# Altium PCB Exp 11a.PcbDoc
Units mm, origin at the board's own origin, x right, y up, seen from the top; angles counter-clockwise.
Board outline 134.49 x 84.46 mm, 2 copper layers (Top Layer, Bottom Layer); 44 components, 34 nets, 146 pads, 16 vias.
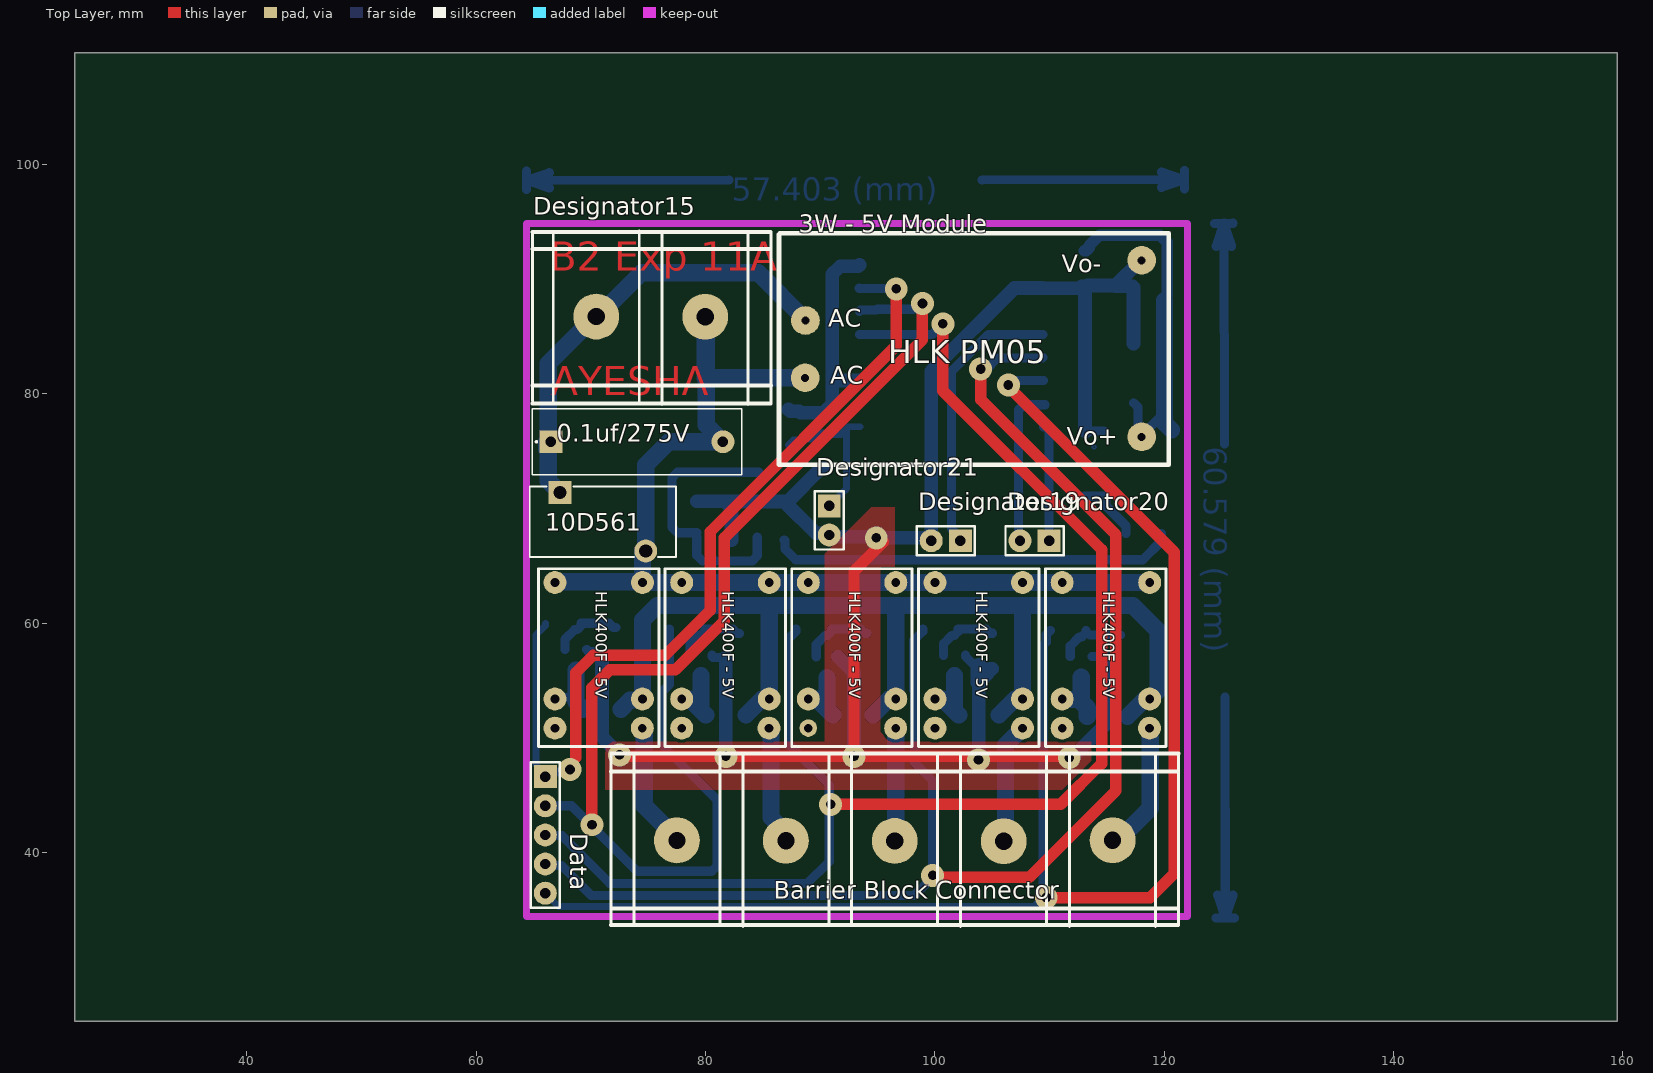
[diagram p0: Top Layer view]
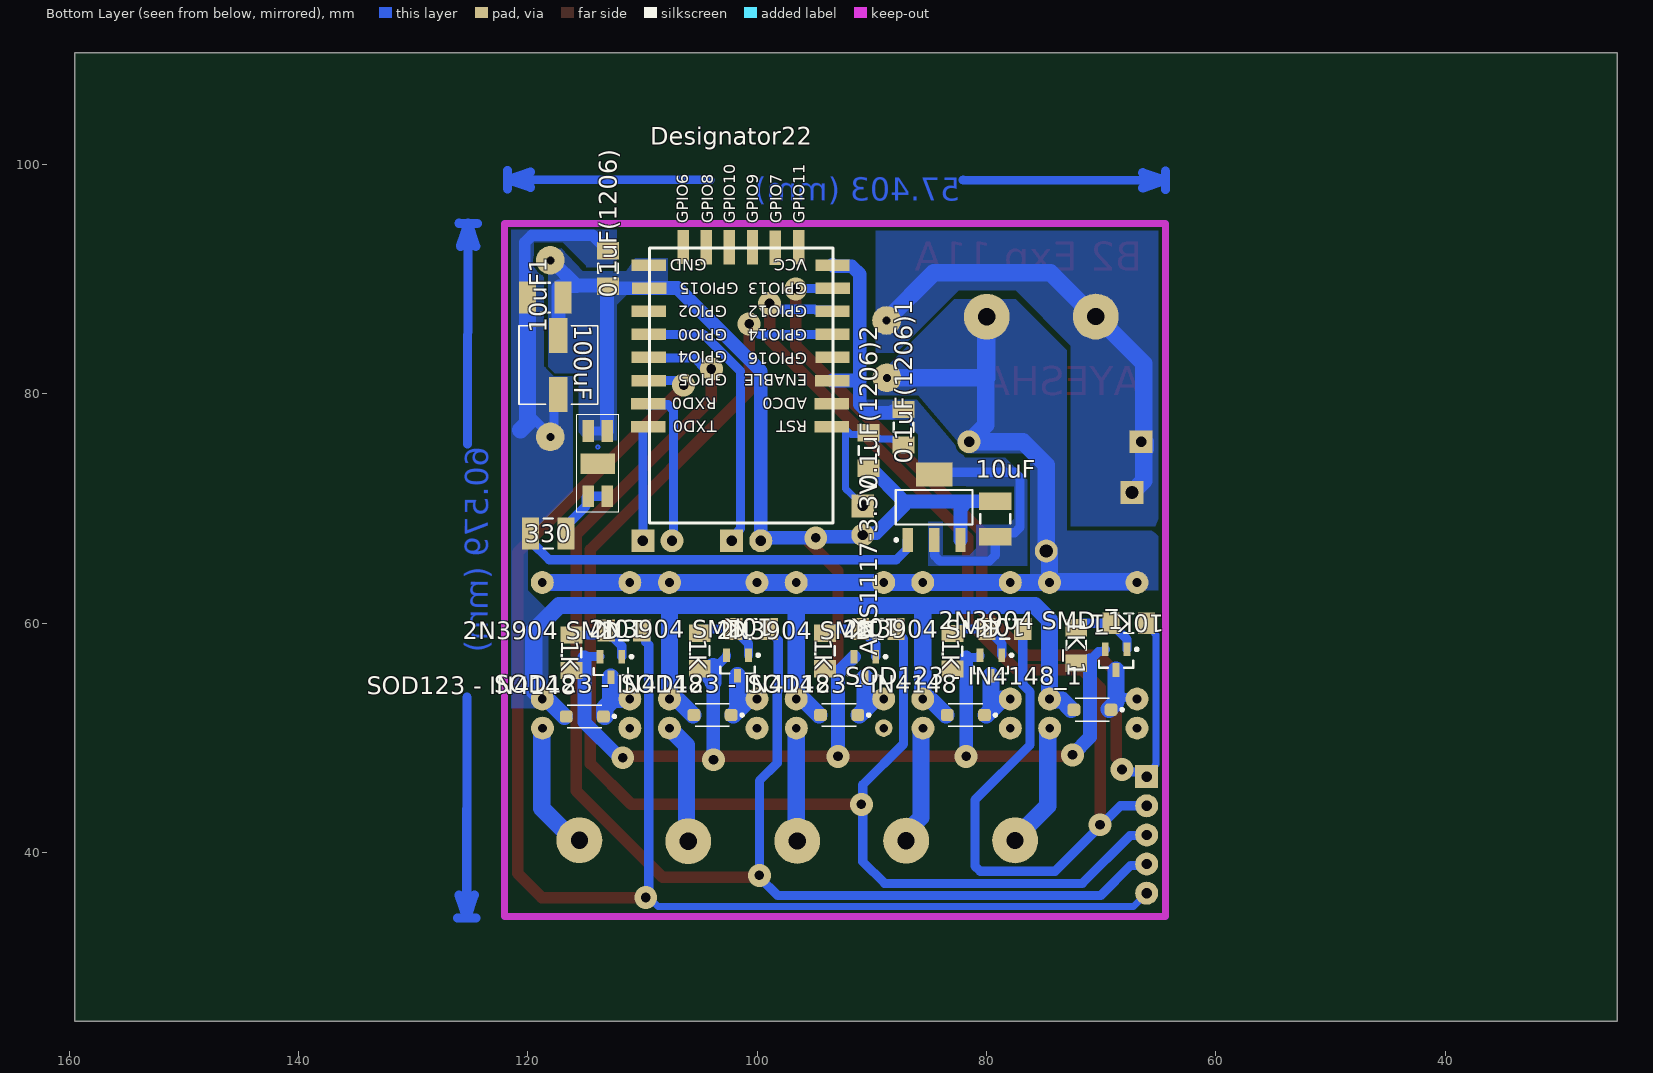
[diagram p1: Bottom Layer view, seen from below]

## Layer stack, top to bottom
Top Solder: solder mask 0.0102, Solder Resist, Dk 3.5
Top Layer: signal copper 0.0356
Dielectric 1: dielectric 0.32, FR-4, Dk 4.8
Bottom Layer: signal copper 0.0356
Bottom Solder: solder mask 0.0102, Solder Resist, Dk 3.5

## Board outline
25.019,25.273 159.512,25.273 159.512,109.728 25.019,109.728

## Design rules (kind name [scope] priority, off if disabled: settings)
Clearance [All] p1: gap=0.254 ignorepadtopadclearanceinfootprint=FALSE except(0: Arc-Hole Track-Hole SMDPad-Hole THPad-Hole Via-Hole Fill-Hole Poly-Hole Region-Hole Text-Hole)
PlaneConnect [All] p1: planeconnectstyle=Direct reliefexpansion=0.508 reliefentries=4 reliefconductorwidth=0.254 reliefairgap=0.254
PolygonConnect PolygonConnect_2 [All] p1: connectstyle=Direct reliefconductorwidth=0.254 reliefentries=4 polygonreliefangle="90 Angle" airgapwidth=0.254
PolygonConnect PolygonConnect_1 [All] p2: connectstyle=Direct reliefconductorwidth=0.254 reliefentries=4 polygonreliefangle="90 Angle" airgapwidth=0.254
PolygonConnect [All] p3: connectstyle=Direct reliefconductorwidth=0.254 reliefentries=4 polygonreliefangle="90 Angle" airgapwidth=0.254
RoutingVias [All] p1: holewidth=0.711 width=1.27 viastyle="Through Hole" minholewidth=0.711 minwidth=1.27 maxholewidth=0.711 maxwidth=1.27
SolderMaskExpansion [All] p1: expansion=0.102 istentingtop=FALSE
Width [All] p1: maxlimit=1.5 minlimit=0.2 preferedwidth=1 toplayer_minwidth=0.6 bottomlayer_prefwidth=0.6 minimp=50.000000 maximp=50.000000 favimp=50.000000
29 further rules are at their usual default settings.

## Components (designator, comment, footprint, x,y, rotation, side; value= is the part's Value field where it differs from the comment)
0.1uF(1206) "Comment" CAPC3216M 113.03,90.932 r90 bottom
0.1uF(1206)1 "Comment" CAPC3216M 87.249,77.089 r90 bottom
0.1uF(1206)2 "Comment" CAPC3216M 90.297,75.057 r90 bottom
0.1uf/275V "Comment" CAP_ECQ-UAAF104MA_PAN 66.534,75.819 r0 top
1K "Comment" RESC3216M 82.979,57.548 r270 bottom
1K "Comment" RESC3216M 94.107,57.575 r270 bottom
1K "Comment" RESC3216M 105.029,57.575 r270 bottom
1K "Comment" RESC3216M 116.205,57.422 r270 bottom
1K_1 "Comment" RESC3216M 72.184,58.056 r270 bottom
"2N3904 SMD" "Comment" SOT23-3L 79.629,56.305 r270 bottom
"2N3904 SMD" "Comment" SOT23-3L 90.617,56.167 r270 bottom
"2N3904 SMD" "Comment" SOT23-3L 101.727,56.305 r270 bottom
"2N3904 SMD" "Comment" SOT23-3L 112.776,56.178 r270 bottom
"2N3904 SMD_1" "Comment" SOT23-3L 68.707,56.813 r270 bottom
"3W - 5V Module" "Comment" HLK-PM05 103.378,83.947 r0 top
10D561 "Comment" MOV-10D561K_BRN 67.31,71.399 r0 top
10K "Comment" RESC3216M 78.407,59.479 r0 bottom
10K "Comment" RESC3216M 89.456,59.479 r0 bottom
10K "Comment" RESC3216M 100.505,59.479 r0 bottom
10K "Comment" RESC3216M 111.633,59.353 r0 bottom
10K_1 "Comment" RESC3216M 67.612,59.987 r0 bottom
10uF "Comment" CAPC3225M 79.248,69.088 r90 bottom
10uF1 "Comment" CAPC3225M 118.491,88.392 r180 bottom
100uF "Comment" CHEMI-F80 117.348,82.512 r270 bottom
330 "Comment" RESC3225M 118.237,67.818 r180 bottom
AMS1117-3.3V "Comment" SOT223-4L 84.582,70.104 r90 bottom
"Barrier Block Connector" "Comment" "Barrier Block Connector"#1 96.52,41.021 r90 top
Data "Comment" HDR1X5 66.04,46.609 r270 top
Designator15 "Comment" "Barrier Block Connector"#2 60.985,86.747 r270 top
Designator19 "Comment" HDR1X2 102.235,67.183 r180 top
Designator20 "Comment" HDR1X2 109.982,67.183 r180 top
Designator21 "Comment" HDR1X2 90.805,70.231 r270 top
Designator22 "Comment" esp8266-12F 101.473,84.963 r90 bottom
"SOD123 - IN4148" "Comment" SODFL3718X108N 81.836,51.986 r0 bottom
"SOD123 - IN4148" "Comment" SODFL3718X108N 92.885,51.986 r0 bottom
"SOD123 - IN4148" "Comment" SODFL3718X108N 103.934,51.986 r0 bottom
"SOD123 - IN4148" "Comment" SODFL3718X108N 115.062,51.86 r0 bottom
"SOD123 - IN4148_1" "Comment" SODFL3718X108N 70.79,52.451 r0 bottom
? "Comment" HLK400F-5V#1 114.935,57.194 r270 top
? "Comment" HLK400F-5V#2 92.794,57.194 r270 top
? "Comment" HLK400F-5V#1 103.85,57.194 r270 top
? "Comment" HLK400F-5V#1 81.752,57.194 r270 top
? "Comment" SMD-LED 113.919,73.914 r90 bottom
? "Comment" HLK400F-5V#1 70.696,57.194 r270 top

## Footprints (in the part's own frame and the unit in brackets; to place one, negate y for a bottom-side part, rotate by r counter-clockwise, add the part's x,y. Pads: shape width x height; smd on the part's side, far side on the other; paste and mask are expansions set on the pad)
"Barrier Block Connector"#1 [mm] "5 pin Barrier Block Connector"
  round 4 hole 1.5: 1(0.031,19) 2(0.006,9.5) 3(-0.019,0) 4(-0.044,-9.5) 5(0.044,-19)
  silkscreen extent -7.47,-24.75 7.68,24.75
"Barrier Block Connector"#2 [mm] "8 pin Barrier Block Connector"
  round 4 hole 1.5: 1(0.031,19) 2(0.006,9.5)
  silkscreen extent -7.47,3.94 7.68,24.75
CAP_ECQ-UAAF104MA_PAN [mm]
  rect 2x2 hole 0.914 mask+0: 1(0,0)
  round 2 hole 0.914 mask+0: 2(15,0)
  silkscreen extent -1.63,-2.88 16.63,2.88, body extent -1.5,-2.76 16.5,2.76, height 12.5
CAPC3216M [mm] "Chip Capacitor, Body 3.2x1.6mm, IPC Low Density"
  rect 1.5x1.9 smd: 1(-1.55,0) 2(1.55,0)
  silkscreen extent -0.4,-0.85 0.4,0.85, body extent -1.7,-0.9 1.7,0.9, height 1.35
CAPC3225M [mm] "Chip Capacitor, Body 3.2x2.5mm, IPC Low Density"
  rect 1.5x2.8 smd: 1(-1.55,0) 2(1.55,0)
  silkscreen extent -0.4,-1.3 0.4,1.3, body extent -1.7,-1.35 1.7,1.35, height 1.35
CHEMI-F80 [mil]
  rect 120x63 smd paste+0 mask+0: 1(-101.5,0) 2(101.5,0)
  silkscreen extent -135,-135 135,135, body extent -141,-130 141,130, height 305
esp8266-12F [mm]
  rect 1x3 smd: 0(-7.837,-7.979) 0(-7.836,8.029) 0(-5.812,-7.954) 0(-5.811,8.054) 0(-3.812,-8.004) 0(-3.811,8.004) 0(-1.787,-8.029) 0(-1.786,7.979) 0(0.212,-8.029) 0(0.213,7.979) 0(2.237,-8.029) 0(2.238,7.979) 0(4.237,-8.054) 0(4.238,7.954) 0(6.262,-8.029) 0(6.263,7.979)
  rect 3x1 smd: 0(7.787,-3.054) 0(7.812,-5.079) 0(7.812,-1.054) 0(7.812,0.971) 0(7.812,2.971) 0(7.838,4.996)
  silkscreen extent -16.24,-8.07 7.76,7.93
HDR1X2 [mm] "Connector; Header; 2 Position"
  rect 2x2 hole 0.9: 1(0,0)
  round 2 hole 0.9: 2(2.54,0)
  silkscreen extent -1.27,-1.27 3.81,1.27
HDR1X5 [mm] "Connector; Header; 5 Position"
  rect 2x2 hole 0.9: 1(0,0)
  round 2 hole 0.9: 2(2.54,0) 3(5.08,0) 4(7.62,0) 5(10.16,0)
  silkscreen extent -1.27,-1.27 11.43,1.27
HLK400F-5V#1 [mm]
  round 2 hole 0.762: "Coil B"(3.81,-3.817) CoilA(3.81,3.818) Common(-6.35,3.818) Common(-6.35,-3.817) NC(6.35,-3.817) NO(6.35,3.802)
  silkscreen extent -7.55,-5.26 7.95,5.24
HLK400F-5V#2 [mm]
  round 2 hole 0.762: "Coil B"(3.81,-3.817) CoilA(3.81,3.818) Common(-6.35,3.818) Common(-6.35,-3.817) NO(6.35,3.802)
  round 1.524 hole 0.762: NC(6.35,-3.817)
  silkscreen extent -7.55,-5.26 7.95,5.24
HLK-PM05 [mm]
  round 2.5 hole 0.7: 0(-14.65,2.45) 1(-14.675,-2.55) 2(14.675,7.7) 3(14.675,-7.7)
  silkscreen extent -16.96,-10.15 17.03,10.07
MOV-10D561K_BRN [mm]
  rect 2x2 hole 1.143 mask+0: 1(0,0)
  round 2 hole 1.143 mask+0: 2(7.493,-5.105)
  silkscreen extent -2.63,-5.63 10.12,0.52
RESC3216M [mm] "Chip Resistor, Body 3.2x1.6mm, IPC Low Density"
  rect 1.5x1.9 smd: 1(-1.55,0) 2(1.55,0)
  silkscreen extent -0.4,-0.85 0.4,0.85, body extent -1.68,-0.87 1.68,0.87, height 0.71
RESC3225M [mm] "Chip Resistor, Body 3.2x2.5mm, IPC Low Density"
  rect 1.5x2.8 smd: 1(-1.55,0) 2(1.55,0)
  silkscreen extent -0.4,-1.3 0.4,1.3, body extent -1.68,-1.32 1.68,1.32, height 0.71
SMD-LED [mm] "SMD LED PCB"
  rect 1.9x1 smd: 1(-2.85,0.82) 2(-2.85,-0.82) 3(2.85,-0.82) 4(2.85,0.82)
  rect 1.8x3 smd: 5(0,0)
  Top Layer circle w0.154: c1.441,-0.01 r0.149
  silkscreen extent -4.25,-1.84 4.25,1.82
SODFL3718X108N [mm]
  rrect50% 1.12x1.08 smd: A(1.6,0) C(-1.645,0)
  silkscreen extent -2.72,-1 1.5,1
SOT23-3L [mm] "SOT23, 3-Leads, Body 2.9x1.3mm, Pitch 0.95mm, Lead Span 2.5mm, IPC High Density"
  rect 1.2x0.6 smd: b(-0.9,0.95) c(0.9,0) e(-0.9,-0.95)
  silkscreen extent -1.02,-1.5 0.7,1.92, body extent -0.7,-1.5 0.7,1.5, height 1.1
SOT223-4L [mm] "SOT223, 4-Leads, Body 6.5x3.5mm, Pitch 2.3mm, Lead Span 7mm, IPC High Density"
  rect 2.1x0.9 smd: 1(-2.85,2.3) 2(-2.85,0) 3(-2.85,-2.3)
  rect 2.1x3.2 smd: 4(2.85,0)
  silkscreen extent -2.97,-3.35 1.5,3.43, body extent -1.85,-3.35 1.85,3.35, height 1.8

## Via types
v1: diameter 2, hole 0.85, Top Layer to Bottom Layer, 16 vias

## Nets (pads, with @x,y where several pads share a name; then routed paths per layer and width w, separated by ;. In a path a pad name is that pad's centre, name@x,y a point inside that pad or via, vN(x,y) a via of type N, cw(c..) or ccw(c..) an arc to the next point about the centre after c; other vN are vias at no path point)
"AC GND": 0.1uf/275V.1 10D561.1 "3W - 5V Module.0" Designator15.2 | length 39.3
  Bottom Layer w1.5: 0.1uf/275V.1@66.167,75.819 66.167,75.184 66.294,75.057 66.294,72.415 10D561.1 ; 0.1uf/275V.1@66.294,75.819 66.294,82.644 70.391,86.741 Designator15.2@70.579,86.741 ; Designator15.2 70.612,86.741 74.422,90.551 84.619,90.551 88.773,86.397
"AC Live": 0.1uf/275V.2 10D561.2 "3W - 5V Module.1" ?.Common Designator15.1 | length 95.8
  Bottom Layer w0.8: ?.Common@66.878,63.544 ?.Common@67.143,63.279
  Bottom Layer w1.5: ?.Common@66.886,63.545 66.89,63.548 67.412,63.548 67.466,63.602 74.449,63.602 74.507,63.544 ?.Common@74.513,63.544 ; ?.Common@74.357,63.602 74.52,63.765 10D561.2@74.52,66.265 ; ?.Common@74.422,63.544 77.935,63.544 85.57,63.544 88.976,63.544 96.611,63.544 100.033,63.544 107.668,63.544 ?.Common@111.082,63.544 ; 10D561.2@74.774,66.265 10D561.2 74.803,73.787 76.835,75.819 0.1uf/275V.2 80.079,77.274 80.079,81.397 80.079,86.622 Designator15.1 79.985,81.397 88.703,81.397 ; ?.Common@111.118,63.544 ?.Common@118.753,63.544
B1: 1K.1@116.205,58.972 10K.2@113.183,59.353 "2N3904 SMD.b"@111.826,57.078 | length 5.6
  Bottom Layer w0.8: 111.826,57.078 111.826,57.996 112.633,58.803 112.833,58.803 113.183,59.153 10K.2@113.183,59.353 ; 10K.2@113.533,58.972 1K.1@116.205,58.972
B2: 1K.1@105.029,59.125 10K.2@102.055,59.479 "2N3904 SMD.b"@100.777,57.205 | length 6
  Bottom Layer w0.8: 100.777,57.205 100.777,58.201 101.505,58.929 101.705,58.929 102.055,59.279 102.055,59.479 104.475,59.479 104.829,59.125 1K.1@105.029,59.125
B3: 1K.1@94.107,59.125 10K.2@91.006,59.479 "2N3904 SMD.b"@89.667,57.067 | length 6.3
  Bottom Layer w0.8: 89.667,57.067 89.667,58.14 90.456,58.929 90.656,58.929 91.006,59.279 91.006,59.479 93.553,59.479 93.907,59.125 1K.1@94.107,59.125
B4: 1K.1@82.979,59.098 10K.2@79.957,59.479 "2N3904 SMD.b"@78.679,57.205 | length 6.1
  Bottom Layer w0.8: 78.679,57.205 78.679,58.201 79.407,58.929 79.607,58.929 79.957,59.279 79.957,59.479 82.398,59.479 82.779,59.098 1K.1@82.979,59.098
B5: 1K_1.1 10K_1.2 "2N3904 SMD_1.b" | length 6.2
  Bottom Layer w0.8: 67.757,57.713 67.757,58.582 68.612,59.437 68.812,59.437 69.162,59.787 10K_1.2 71.603,59.987 71.984,59.606 1K_1.1
C1: "2N3904 SMD.c"@112.776,55.278 "?.Coil B"@111.118,53.384 "SOD123 - IN4148.C"@113.417,51.86 | length 5.3
  Bottom Layer w1.5: 111.118,53.384 111.124,53.384 111.168,53.34 112.776,53.34 ; 112.776,55.278 112.776,53.379 112.776,53.142 113.308,52.61 113.308,51.86
C2: "2N3904 SMD.c"@101.727,55.405 "?.Coil B"@100.033,53.384 "SOD123 - IN4148.C"@102.289,51.986 | length 5.6
  Bottom Layer w1.5: 100.033,53.384 100.038,53.379 100.706,53.379 101.214,52.871 102.099,51.986 ; 101.727,52.411 101.727,55.405
C3: "2N3904 SMD.c"@90.617,55.267 "?.Coil B"@88.976,53.384 "SOD123 - IN4148.C"@91.24,51.986 | length 6.2
  Bottom Layer w1.5: 88.976,53.384 88.981,53.379 89.718,53.379 91.111,51.986 90.617,52.48 90.617,55.267
C4: "2N3904 SMD.c"@79.629,55.405 "?.Coil B"@77.935,53.384 "SOD123 - IN4148.C"@80.191,51.986 | length 5.7
  Bottom Layer w1.5: 77.935,53.384 77.94,53.379 78.641,53.379 79.629,52.391 ; 79.629,55.405 79.629,52.391 ; 80.034,51.986 79.629,52.391
C5: "2N3904 SMD_1.c" "?.Coil B"@66.878,53.384 "SOD123 - IN4148_1.C" | length 5.9
  Bottom Layer w0.8: 66.787,53.384 66.926,53.522 68.084,53.522 68.707,54.146
  Bottom Layer w1.5: 68.707,55.913 68.707,54.146 68.707,53.11 69.323,52.494
"DC GND": 0.1uF(1206)2.1 0.1uF(1206).1 1K.2 1K_1.2 10uF1.2 10uF.2 100uF.1 "2N3904 SMD.e" "2N3904 SMD_1.e" "3W - 5V Module.2" ?.3 ?.4 AMS1117-3.3V.3 Designator19.2 Designator21.2 Designator22.0@109.427,89.201 Designator22.0@109.452,91.226 | length 200.2
  Top Layer w1: v1(72.517,48.514) 72.644,48.387 v1(81.788,48.387) v1(92.964,48.387) ; v1@95.536,67.088 92.964,64.516 v1(92.964,48.387) ; v1(111.737,48.26) 111.506,48.26 111.379,48.387 v1(92.964,48.387)
  Bottom Layer w0.8: 69.657,57.713 69.757,57.613 69.757,57.513 70.249,57.513 71.009,56.753 ; 10uF.2@79.655,70.612 79.75,70.517 81.756,70.517 82.156,70.117 ; 80.579,57.205 80.579,57.105 80.679,57.005 81.772,57.005 ; 102.677,57.205 102.677,57.105 103.571,56.211 103.853,56.211 ; ?.3@113.199,76.764 ?.4 ; 113.726,57.078 114.999,57.078 115.062,57.015
  Bottom Layer w1.2: 71.009,56.753 70.976,56.72 70.976,50.055 v1(72.517,48.514) ; 10uF.2 79.266,70.62 81.653,70.62 81.661,70.612 82.156,70.612 87.202,70.612 90.097,73.507 90.297,73.507 ; 81.772,57.005 81.772,48.403 v1(81.788,48.387) ; 82.03,70.243 82.282,69.991 AMS1117-3.3V.3 ; 87.121,70.358 89.635,67.844 Designator21.2@90.805,67.844 ; Designator21.2@90.958,67.538 v1@94.806,67.538 ; 91.567,57.067 92.964,55.67 v1@92.964,49.022 ; v1(94.907,67.437) 99.441,67.437 Designator19.2 99.695,68.961 99.695,81.964 106.959,89.227 109.401,89.227 109.427,89.201 112.649,89.201 112.83,89.382 113.03,89.382 ; v1@103.853,48.792 103.853,54.848 104.679,55.675 104.679,55.875 104.829,56.025 1K.2@105.029,56.025 ; v1(111.737,48.26) 111.977,48.26 115.062,51.345 115.062,57.015 ; ?.3@113.199,76.764 ?.3 113.099,89.232 113.324,89.457 115.78,89.457 117.97,91.647 118.053,91.647 ; 115.78,89.382 117.254,89.382 117.348,89.288 100uF.1@117.348,84.366
  Bottom Layer w1.5: 103.853,54.848 103.853,56.211
  other v1: 103.819,48.087
FLASH: Designator19.1 Designator22.0@109.452,85.176 | length 24.4
  Bottom Layer w0.8: Designator19.1 101.635,67.783 101.635,68.087 101.47,68.252 101.47,81.965 104.681,85.176 Designator22.0@109.452,85.176
GPIO4: 10K.1@98.955,59.479 Data.4 Designator22.0@109.452,83.177 | length 124.7
  Top Layer w1: Data.4 Data.4@66.231,38.798 ; v1(99.822,38.003) 99.979,37.846 108.263,37.846 115.808,45.391 115.808,67.707 104.013,79.502 v1(104.013,82.169)
  Bottom Layer w0.8: Data.4@66.548,38.989 66.548,38.915 66.594,38.868 67.431,38.868 70.053,36.246 98.222,36.246 99.822,37.846 99.822,46.244 98.265,47.8 98.265,54.069 98.171,54.163 98.171,58.495 98.955,59.279 10K.1@98.955,59.479 ; v1(104.013,82.169) 104.514,82.169 105.463,83.117 109.393,83.117 Designator22.0@109.452,83.177
GPIO5: 10K.1@110.083,59.353 Data.5 Designator22.0@109.477,81.152 | length 132
  Top Layer w1: v1(106.426,80.772) 106.426,80.645 120.888,66.183 120.888,38.166 118.79,36.068 v1(109.728,36.068)
  Bottom Layer w0.6: Data.5 67.197,35.292 108.677,35.292 109.453,36.068 v1(109.728,36.068)
  Bottom Layer w0.8: v1(106.426,80.772) 106.624,80.772 107.003,81.152 Designator22.0@109.477,81.152 ; v1(109.728,36.068) 109.728,36.322 109.463,36.587 109.463,58.096 109.733,58.365 109.733,59.003 10K.1@110.083,59.353
GPIO12: 10K.1@76.857,59.479 Data.2 Designator22.0@93.444,87.2 | length 106.8
  Top Layer w1: Data.2 Data.2@66.311,44.069 ; v1(70.104,42.418) 70.104,54.356 71.673,55.925 77.388,55.925 81.661,60.198 81.661,67.437 98.933,84.709 v1(98.933,87.884)
  Bottom Layer w0.8: Data.2@66.548,44.069 68.326,44.069 70.04,42.355 74.041,38.354 80.557,38.354 81.026,38.823 81.026,44.577 76.207,49.396 76.207,53.995 76.857,54.644 10K.1@76.857,59.479 ; Designator22.0@93.444,87.2 93.544,87.3 94.937,87.3 95.013,87.376 98.1,87.376 98.608,87.884 v1(98.933,87.884)
GPIO13: 10K_1.1 Data.1 Designator22.0@93.419,89.2 | length 76.3
  Top Layer w1: Data.1 Data.1@66.484,47.053 ; 68.707,48.26 68.707,55.685 70.202,57.179 76.483,57.179 80.407,61.103 80.407,67.956 96.647,84.196 96.647,88.756 v1@96.52,88.883
  Bottom Layer w0.6: Data.1 65.34,47.309 65.34,47.563 65.243,47.66 65.243,58.985 65.594,59.337 65.612,59.337 66.062,59.787 10K_1.1
  Bottom Layer w0.8: Data.1 66.445,47.014 67.969,47.014 v1(68.199,47.244) ; Designator22.0@93.419,89.2 93.442,89.177 96.624,89.177 v1(96.647,89.154)
GPIO14: 10K.1@87.906,59.479 Data.3 Designator22.0@93.444,85.175 | length 126.1
  Top Layer w1: v1(90.932,44.196) 110.998,44.196 114.554,47.752 114.554,66.421 100.711,80.264 v1@100.711,86.559
  Bottom Layer w0.8: Data.3@66.548,41.529 66.548,41.518 66.594,41.472 67.494,41.472 71.666,37.3 88.901,37.3 90.805,39.204 90.805,44.196 90.805,45.904 87.249,49.46 87.249,58.622 87.906,59.279 10K.1@87.906,59.479 ; Designator22.0@93.444,85.175 99.78,85.175 v1(100.711,86.106)
LED-R: 330.2 ?.1 ?.2 | length 5.7
  Bottom Layer w0.8: ?.2 ?.1 ; ?.1@114.84,71.064 114.94,70.964 114.94,70.215 116.687,68.468 330.2
NO1: "Barrier Block Connector.5" ?.NO@118.737,50.844 | length 11.5
  Bottom Layer w1.5: 115.52,41.065 116.02,41.065 118.804,43.849 118.804,50.771 118.731,50.844 ?.NO@118.726,50.844
NO2: "Barrier Block Connector.4" ?.NO@107.653,50.844 | length 10.5
  Bottom Layer w1.5: 106.02,40.977 106.02,41.518 106.172,41.67 106.172,49.356 107.653,50.837 ?.NO@107.653,50.844
NO3: "Barrier Block Connector.3" ?.NO@96.596,50.844 | length 10
  Bottom Layer w1.5: ?.NO@96.596,50.844 96.596,41.186 96.824,40.958
NO4: "Barrier Block Connector.2" ?.NO@85.555,50.844 | length 9.8
  Bottom Layer w1.5: ?.NO@85.555,50.844 85.555,50.837 85.725,50.667 85.725,43.053 87.122,41.656
NO5: "Barrier Block Connector.1" ?.NO@74.498,50.844 | length 11.2
  Bottom Layer w1.5: ?.NO@74.498,50.844 74.498,50.708 74.676,50.531 74.676,44.062 77.73,41.009
"P +Vo": 
"P -Vo": 
RST: 0.1uF(1206)1.1 0.1uF(1206)2.2 Designator21.1 Designator22.0@93.494,77.126 | length 14.3
  Bottom Layer w0.6: 87.249,75.539 87.699,75.989 88.166,75.989 88.25,76.073 89.296,76.073 89.38,76.157 89.647,76.157 90.097,76.607 90.297,76.607 90.45,76.454 91.823,76.454 Designator22.0@92.294,76.926 ; Designator21.1 91.892,71.318 92.294,71.72 Designator22.0@92.294,76.926 ; Designator22.0@93.494,77.126 92.494,77.126 Designator22.0@92.294,76.926
RXD0: Designator20.2 Designator22.0@109.527,79.152 | length 13.9
  Bottom Layer w0.8: Designator20.2 107.315,67.31 107.315,78.583 107.784,79.052 Designator22.0@109.609,79.052
SOT-Vin: 
SOT-Vout: 
TXD0: Designator20.1 Designator22.0@109.502,77.127 | length 10.4
  Bottom Layer w0.8: Designator22.0@109.502,77.127 109.882,77.127 109.982,77.027 Designator20.1
"VCC 3V": 0.1uF(1206)1.2 10uF.1 AMS1117-3.3V.2 AMS1117-3.3V.4 Designator22.0@93.444,91.225 Designator22.0@93.469,81.151 | length 44.2
  Bottom Layer w0.8: 10uF.1 79.248,65.913 79.756,65.405 84.063,65.405 84.532,65.874 AMS1117-3.3V.2@84.532,67.485 ; 10uF.1@79.248,67.888 77.558,67.888 77.089,68.357 77.089,72.683 77.558,73.152 AMS1117-3.3V.4@84.653,73.152
  Bottom Layer w1.2: 87.249,78.639 87.399,78.489 88.172,78.489 88.302,78.359 90.356,78.359 91.059,79.062 91.059,80.772 91.44,81.153 ; Designator22.0@93.444,91.225 93.344,91.125 91.762,91.125 91.059,90.423 91.059,81.153 91.44,81.153 ; Designator22.0@93.469,81.151 93.467,81.153 91.44,81.153
"VCC 5V": 0.1uF(1206).2 10uF1.1 100uF.2 330.1 "3W - 5V Module.3" "SOD123 - IN4148.A" "SOD123 - IN4148_1.A" ?.CoilA AMS1117-3.3V.1 | length 161.8
  Bottom Layer w0.8: AMS1117-3.3V.1 86.932,67.204 86.932,66.484 87.887,65.529 118.148,65.529 119.787,67.168 330.1 ; 100uF.2@117.348,79.21 117.728,78.83 117.728,76.572 ; 118.046,76.334 119.6,77.888 120.041,78.33
  Bottom Layer w1: 113.03,92.482 113.23,92.482 113.48,92.732 113.48,92.932 114.363,93.815 119.683,93.815 120.269,93.229 120.269,88.616 10uF1.1@119.916,88.263
  Bottom Layer w1.5: 72.641,52.494 73.435,53.288 74.418,53.288 74.513,53.384 74.513,60.256 75.797,61.54 85.57,61.54 ; 83.542,51.986 84.935,53.379 85.565,53.379 85.57,53.384 85.57,61.54 ; 94.619,51.986 96.012,53.379 96.607,53.379 96.611,53.384 96.611,61.432 96.504,61.54 ; 105.607,51.986 107,53.379 107.663,53.379 ?.CoilA@107.668,53.384 ; ?.CoilA@107.668,54.12 107.668,61.54 ; 116.816,51.86 118.335,53.379 118.748,53.379 118.753,53.384 118.753,53.39 119.507,54.144 119.507,59.309 117.276,61.54 108.498,61.54 107.668,61.54 ; 10uF1.1@120.041,88.138 120.041,78.33 120.041,77.447 120.65,76.838 ; 85.57,61.54 96.611,61.54 107.668,61.54
pads on no net: ?.5 ?.NC Designator22.0@93.444,83.176 Designator22.0@93.519,79.151 Designator22.0@96.394,92.775 Designator22.0@98.419,92.75 Designator22.0@100.419,92.775 Designator22.0@102.444,92.775 Designator22.0@104.444,92.775 Designator22.0@106.469,92.801 Designator22.0@109.452,87.201
copper on no net: | length 97
  Bottom Layer w0.8: 64.389,99.417 64.391,97.817 ; 66.389,99.286 64.39,98.617 ; 66.391,97.952 64.39,98.617 ; 82.041,98.636 64.39,98.617 ; 104.142,98.66 121.793,98.679 ; 119.792,99.344 121.793,98.679 ; 119.794,98.01 121.793,98.679 ; 121.792,99.479 121.794,97.879 ; 124.422,94.867 126.022,94.871 ; 124.549,34.288 126.149,34.292 ; 124.56,92.868 125.222,94.869 ; 124.678,36.289 125.349,34.29 ; 125.262,75.63 125.222,94.869 ; 125.309,53.529 125.349,34.29 ; 125.893,92.87 125.222,94.869 ; 126.011,36.291 125.349,34.29

## Polygon pours and split planes (outlines as drawn)
"DC GND" on Top Layer "DC_GND_L01_P001" (solid, remove dead copper, pour order 1): 71.374,49.657 71.247,49.53 71.247,45.466 111.125,45.466 113.665,48.006 113.665,49.657 96.139,49.657 95.25,50.546 95.25,64.897 96.52,64.897 96.52,70.104 94.488,70.104 90.424,66.04 90.424,49.657 71.755,49.657 71.374,49.276
no net on Top Layer "NONET_L01_P000" (solid, remove dead copper, pour order 0): 71.374,50.292
"DC GND" on Bottom Layer "DC_GND_L02_P004" (solid, remove dead copper, pour order 4): 118.237,90.043 118.237,82.804 118.237,82.042 117.983,81.788 115.57,81.788 115.57,76.2 115.824,75.946 112.268,75.946 112.268,87.757 111.379,88.646 107.823,88.646 107.823,91.821 109.347,91.821 110.656,91.821 111.425,90.678 115.214,90.678 117.348,92.964 118.237,92.964 118.237,92.583
"VCC 3V" on Bottom Layer "VCC_3V_L02_P006" (solid, remove dead copper, pour order 6): 86.106,79.502 81.861,74.422 78.359,74.422 76.454,72.517 76.454,65.024 85.09,65.024 85.09,68.834 83.82,68.834 83.82,65.913 81.534,65.913 80.899,66.548 80.899,68.58 78.105,68.58 77.575,69.11 77.575,71.878 85.979,72.003 85.979,76.398 86.995,77.724 90.678,77.724 90.678,79.502 89.535,79.502
"VCC 5V" on Bottom Layer "VCC_5V_L02_P005" (solid, remove dead copper, pour order 5): 112.268,91.821 112.268,94.488 112.141,94.615 121.793,94.615 121.793,52.578 118.237,52.578 118.237,61.087 120.015,62.865 120.015,67.564 116.078,71.501 116.078,81.534 117.729,81.534 118.618,82.423 118.618,90.17 119.507,91.059 119.507,93.218 116.967,93.218 114.935,91.186 114.935,91.059 112.141,91.059 112.014,91.186 112.014,92.71
"AC Live" on Bottom Layer "AC_LIVE_L02_P003" (solid, remove dead copper, pour order 3): 65.151,68.072 73.025,68.072 73.025,83.82 77.47,88.265 82.804,88.265 89.662,81.407 89.662,79.883 85.979,79.883 81.661,74.803 76.2,74.803 76.2,62.865 65.024,62.865 65.024,67.564 64.77,67.818
"AC GND" on Bottom Layer "AC_GND_L02_P002" (solid, remove dead copper, pour order 2): 65.024,68.453 72.644,68.453 72.644,84.201 77.47,89.027 82.423,89.027 84.074,87.376 87.884,83.566 89.662,83.566 89.662,94.234 65.024,94.234 65.024,69.088 64.643,68.707

## Keep-outs
Keep-Out Layer:
  lines w0.6: 64.389,34.417 64.389,94.869 122.047,94.869 122.047,34.417 64.389,34.417

## Other copper
Top Layer:
  text "B2 Exp 11A" at 66.413,90.741 h2.5
  text "AYESHA" at 66.54,79.875 h2.5
Bottom Layer:
  text "57.403 (mm)" at 82.297,96.837 h2 r0.06
  text "60.579 (mm)" at 123.463,75.372 h2 r270.12

## Text inside footprints (layer, text, board x,y; h text height)
"3W - 5V Module": Top Overlay "HLK PM05" at 95.934,82.687 h2; Top Overlay "AC" at 90.909,80.887 h1.52; Top Overlay "AC" at 90.709,85.837 h1.52; Top Overlay "Vo+" at 111.509,75.562 h1.52; Top Overlay "Vo-" at 111.078,90.622 h1.52
Designator22: Bottom Overlay "VCC" at 95.653,91.731 h1.02 r180; Bottom Overlay "GPIO13" at 95.653,89.699 h1.02 r180; Bottom Overlay "GPIO12" at 95.653,87.667 h1.02 r180; Bottom Overlay "GPIO14" at 95.653,85.635 h1.02 r180; Bottom Overlay "GPIO16" at 95.653,83.603 h1.02 r180; Bottom Overlay "ENABLE" at 95.653,81.698 h1.02 r180; Bottom Overlay "ADC0" at 95.653,79.666 h1.02 r180; Bottom Overlay "RST" at 95.653,77.634 h1.02 r180; Bottom Overlay "TXD0" at 103.527,77.634 h1.02 r180; Bottom Overlay "RXD0" at 103.527,79.666 h1.02 r180; Bottom Overlay "GPIO5" at 102.638,81.698 h1.02 r180; Bottom Overlay "GPIO4" at 102.638,83.73 h1.02 r180; Bottom Overlay "GPIO0" at 102.638,85.635 h1.02 r180; Bottom Overlay "GPIO2" at 102.638,87.667 h1.02 r180; Bottom Overlay "GPIO15" at 101.622,89.699 h1.02 r180; Bottom Overlay "GND" at 104.416,91.731 h1.02 r180; Bottom Overlay "GPIO11" at 95.848,94.891 h1.02 r270; Bottom Overlay "GPIO7" at 97.88,94.891 h1.02 r270; Bottom Overlay "GPIO9" at 99.912,94.891 h1.02 r270; Bottom Overlay "GPIO10" at 101.944,94.891 h1.02 r270; Bottom Overlay "GPIO8" at 103.849,94.891 h1.02 r270; Bottom Overlay "GPIO6" at 106.008,94.891 h1.02 r270
?: Top Overlay "HLK400F - 5V" at 114.689,62.782 h1.02 r270
?: Top Overlay "HLK400F - 5V" at 92.547,62.782 h1.02 r270
?: Top Overlay "HLK400F - 5V" at 103.604,62.782 h1.02 r270
?: Top Overlay "HLK400F - 5V" at 81.506,62.782 h1.02 r270
?: Top Overlay "HLK400F - 5V" at 70.449,62.782 h1.02 r270